# EAGLE board HIP4081A v1.0 (EAGLE 5.01)

No outline drawn. Coordinates in mm, seen from the top.
Copper layers 16: Bottom 0.035mm
Design rules "default": minimum track width 10mil, minimum drill 24mil, track to track 8mil, track to pad 8mil, pad to pad 8mil, via to via 8mil, smd to smd 8mil, copper to edge 40mil, drill to drill 8mil, minimum pad ring 10mil, minimum via ring 8mil, stop-mask expansion 4mil, vias tented up to drill 0mil, thermal gap 10mil

## Footprints (pad centres in the part's own frame; a part is rotated, then mirrored left to right if it is on the bottom)
C5B2.5 = drill 0.813 pad 1.6 octagon: 1 -2.54,0; 2 2.54,0
DO35-10 = drill 0.813 long: A 5.08,0; C -5.08,0
DIL14 = drill 0.813 long: 1 -7.62,-3.81; 2 -5.08,-3.81; 3 -2.54,-3.81; 4 0,-3.81; 5 2.54,-3.81; 6 5.08,-3.81; 7 7.62,-3.81; 8 7.62,3.81; 9 5.08,3.81; 10 2.54,3.81; 11 0,3.81; 12 -2.54,3.81; 13 -5.08,3.81; 14 -7.62,3.81
TO220H = drill 1.118 long: 1 -2.54,-10.16; 2 0,-10.16; 3 2.54,-10.16 | hole 3.302: 0,4.826
MCS10B = drill 1.016 pad 2.159 octagon: MP 0,0
SE14 = drill 1.397 pad 2.54 octagon: MP 0,0
TO262-V = drill 1.016 long: 1 -2.54,0; 2 0,0; 3 2.54,0
R-10 = drill 0.813 pad 1.6 octagon: 1 -5.08,0; 2 5.08,0
DIL20 = drill 0.813 long: 1 -11.43,-3.81; 2 -8.89,-3.81; 3 -6.35,-3.81; 4 -3.81,-3.81; 5 -1.27,-3.81; 6 1.27,-3.81; 7 3.81,-3.81; 8 6.35,-3.81; 9 8.89,-3.81; 10 11.43,-3.81; 11 11.43,3.81; 12 8.89,3.81; 13 6.35,3.81; 14 3.81,3.81; 15 1.27,3.81; 16 -1.27,3.81; 17 -3.81,3.81; 18 -6.35,3.81; 19 -8.89,3.81; 20 -11.43,3.81
LED3MM = drill 0.813 octagon: A -1.27,0; K 1.27,0

## Placement (x,y rotation side)
C1  [C5B2.5]  -69.85,-163.83 0 top
C2  [C5B2.5]  -69.85,-168.91 0 top
D1  1N4148  [DO35-10]  -66.04,-139.7 0 top
D2  1N4148  [DO35-10]  -66.04,-146.05 0 top
IC1  7404N  [DIL14]  7.62,-88.27 180 top
IC8  7805T  [TO220H]  -121.92,-108.58 180 top
LSP1  MCS10B  [MCS10B]  -127,-194.31 0 top
LSP2  MCS10B  [MCS10B]  -127,-189.23 0 top
LSP3  MCS10B  [MCS10B]  -127,-199.39 0 top
LSP4  MCS10B  [MCS10B]  -127,-204.47 0 top
LSP5  SE14  [SE14]  -125.73,-210.82 0 top
LSP6  SE14  [SE14]  -125.73,-217.17 0 top
LSP7  SE14  [SE14]  -125.73,-223.52 0 top
LSP8  SE14  [SE14]  -125.73,-229.87 0 top
Q1  IRF3704L-V  [TO262-V]  -96.52,-140.97 0 top
Q2  IRF3704L-V  [TO262-V]  -95.25,-151.13 0 top
Q3  IRF3704L-V  [TO262-V]  -95.25,-161.29 0 top
Q4  IRF3704L-V  [TO262-V]  -95.25,-171.45 0 top
R1  500  [R-10]  -67.31,-129.54 0 top
R2  500  [R-10]  -67.31,-134.62 0 top
R3  10  [R-10]  -95.25,-97.79 0 top
R4  10  [R-10]  -95.25,-102.87 0 top
R5  10  [R-10]  -95.25,-107.95 0 top
R6  10  [R-10]  -95.25,-113.03 0 top
R7  500  [R-10]  -95.25,-118.11 0 top
R8  480  [R-10]  -95.25,-123.19 0 top
R9  500  [R-10]  -121.92,-184.15 0 top
U$2  HIP4081A  [DIL20]  -58.42,-119.38 0 top
U$5  [LED3MM]  -71.12,-152.4 0 top
U$6  [LED3MM]  -71.12,-157.48 0 top

## Library data of the parts
C1 C2 = capacitor-wima
D1 D2 = diode
IC1 = 74xx-us
IC8 = linear
LSP1-LSP8 = solpad
Q1-Q4 = transistor-power
R1-R9 = discrete
U$2 = intersil
U$5 U$6 = led

## Nets
+5V: IC1.14 IC8.3
+12V: D1.A D2.A IC8.1 LSP4.MP R9.1 U$2.2 U$2.7 U$2.15 U$2.16
+24V: LSP6.MP Q1.2 Q3.2
N$1: C1.2 LSP7.MP Q1.3 Q2.2 R8.1 U$2.19
N$2: C2.1 LSP8.MP Q3.3 Q4.2 U$2.12 U$5.K U$6.A
N$3: R3.1 U$2.20
N$4: R4.1 U$2.18
N$5: IC1.2 U$2.5
N$6: IC1.1 LSP1.MP R7.2 U$2.6
N$7: R1.2 U$2.9
N$8: R8.2 U$5.A U$6.K
N$9: R2.2 U$2.8
N$10: C1.1 D2.C U$2.1
N$11: R5.2 U$2.11
N$12: R6.2 U$2.13
N$13: C2.2 D1.C U$2.10
N$15: LSP2.MP R9.2 U$2.3
N$16: Q2.1 R4.2
N$17: Q4.1 R6.1
N$18: Q3.1 R5.1
N$19: Q1.1 R3.2
PE: IC1.7 IC8.2 LSP3.MP LSP5.MP Q2.3 Q4.3 R1.1 R2.1 R7.1 U$2.4 U$2.14 U$2.17

## Tracks (layer width: path | path; a pad name or v marks a point on that pad's centre or on a via)
+5V  (1 unrouted)
+12V  (8 unrouted)
+24V  (2 unrouted)
N$1  (5 unrouted)
N$2  (6 unrouted)
N$3  (1 unrouted)
N$4  (1 unrouted)
N$5  (1 unrouted)
N$6  (3 unrouted)
N$7  (1 unrouted)
N$8  (2 unrouted)
N$9  (1 unrouted)
N$10  (2 unrouted)
N$11  (1 unrouted)
N$12  (1 unrouted)
N$13  (2 unrouted)
N$15  (2 unrouted)
N$16  (1 unrouted)
N$17  (1 unrouted)
N$18  (1 unrouted)
N$19  (1 unrouted)
PE  (11 unrouted)